# Altium PCB function_board.PcbDoc
Units mil, origin at the board's own origin, x right, y up, seen from the top; angles counter-clockwise.
Board outline 1380.09 x 1202 mil, 2 copper layers (Top Layer, Bottom Layer), stack 46.444 mil thick; 21 components, 25 nets, 102 pads, 51 vias.
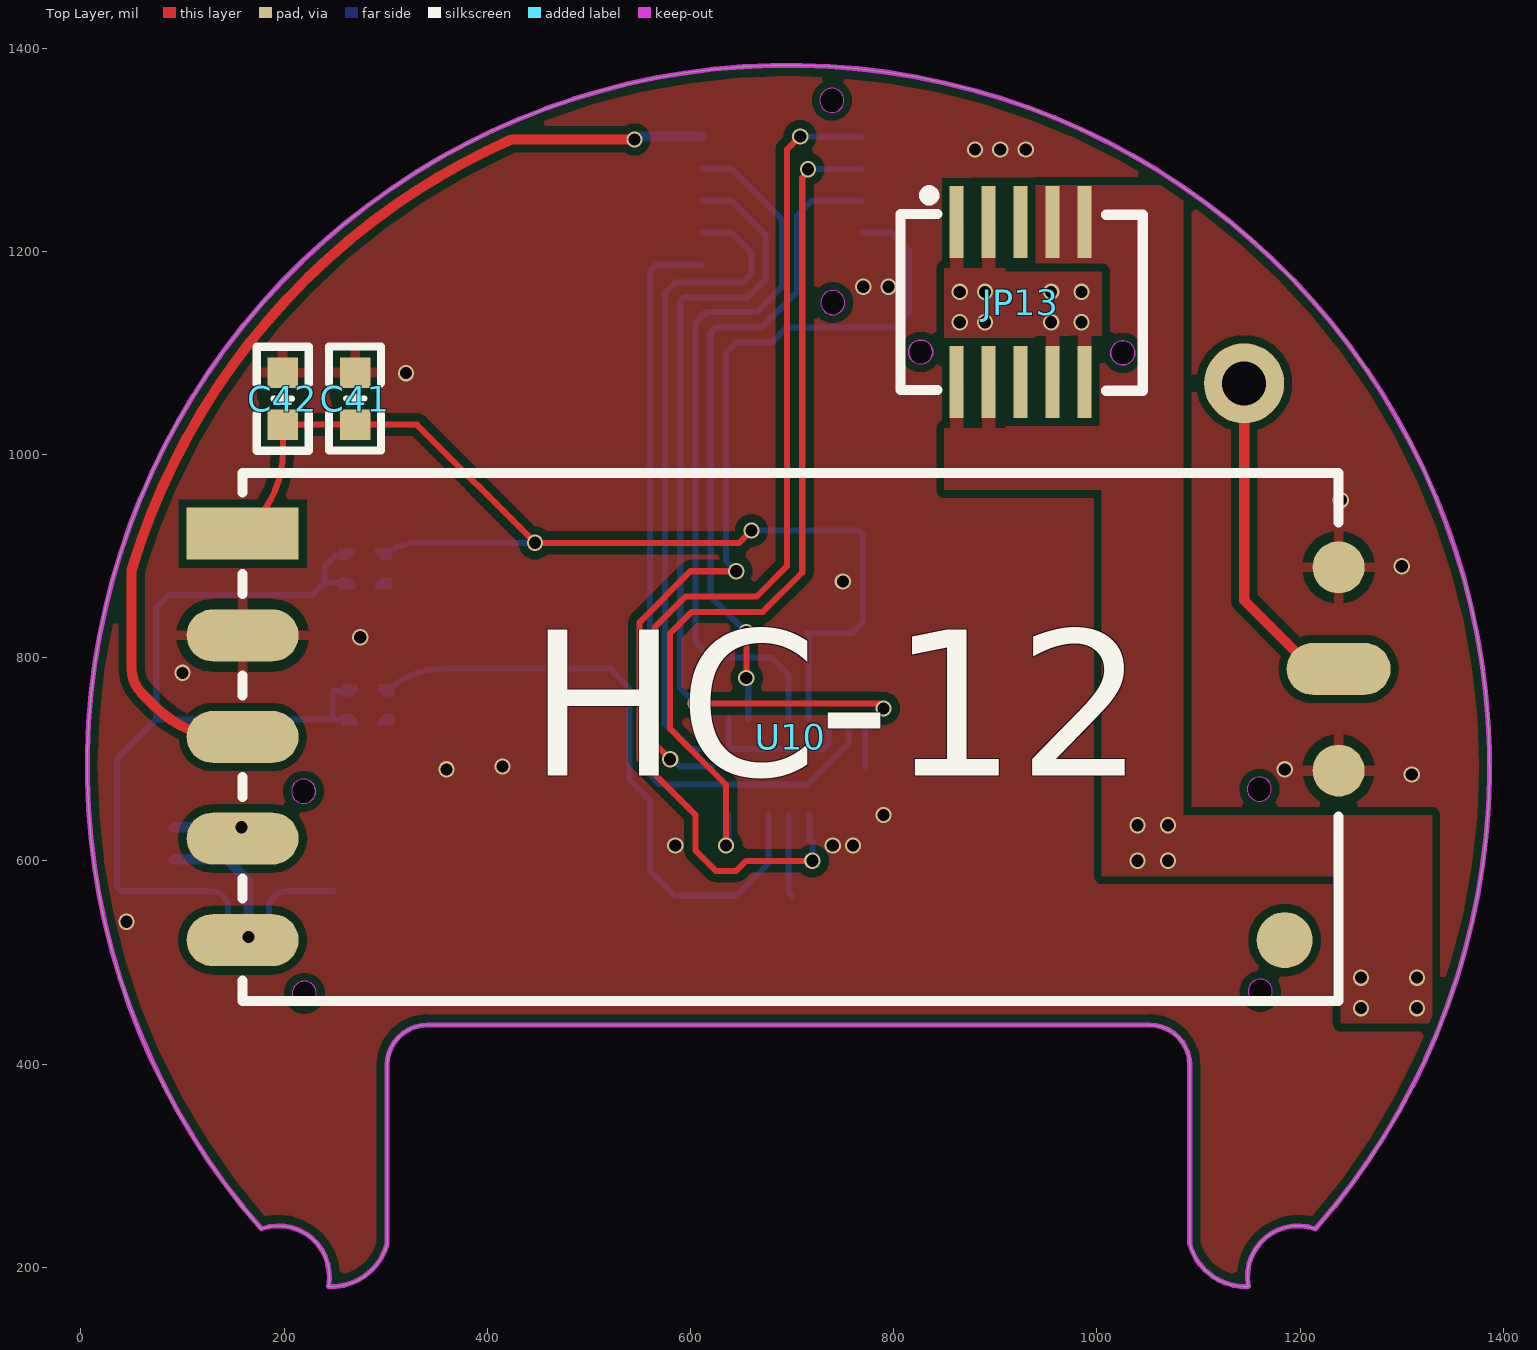
[diagram p0: Top Layer view]
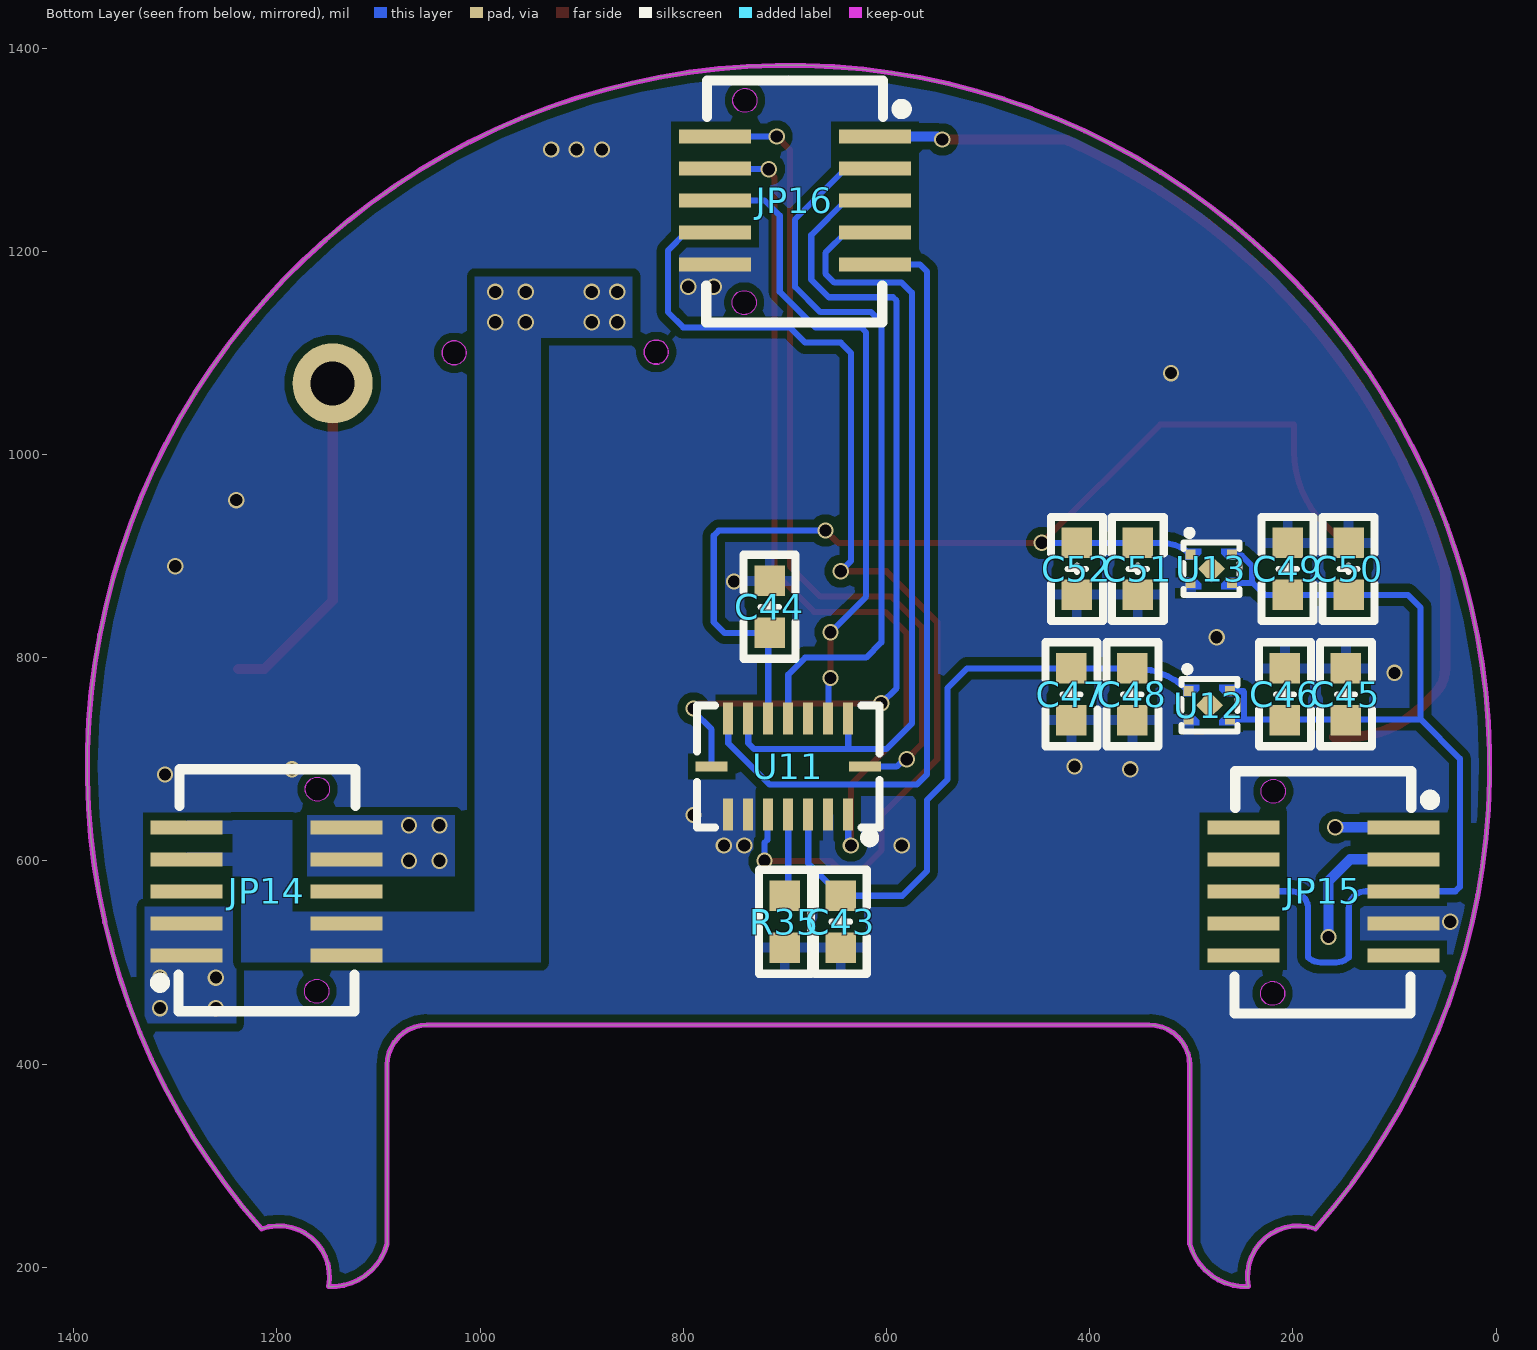
[diagram p1: Bottom Layer view, seen from below]
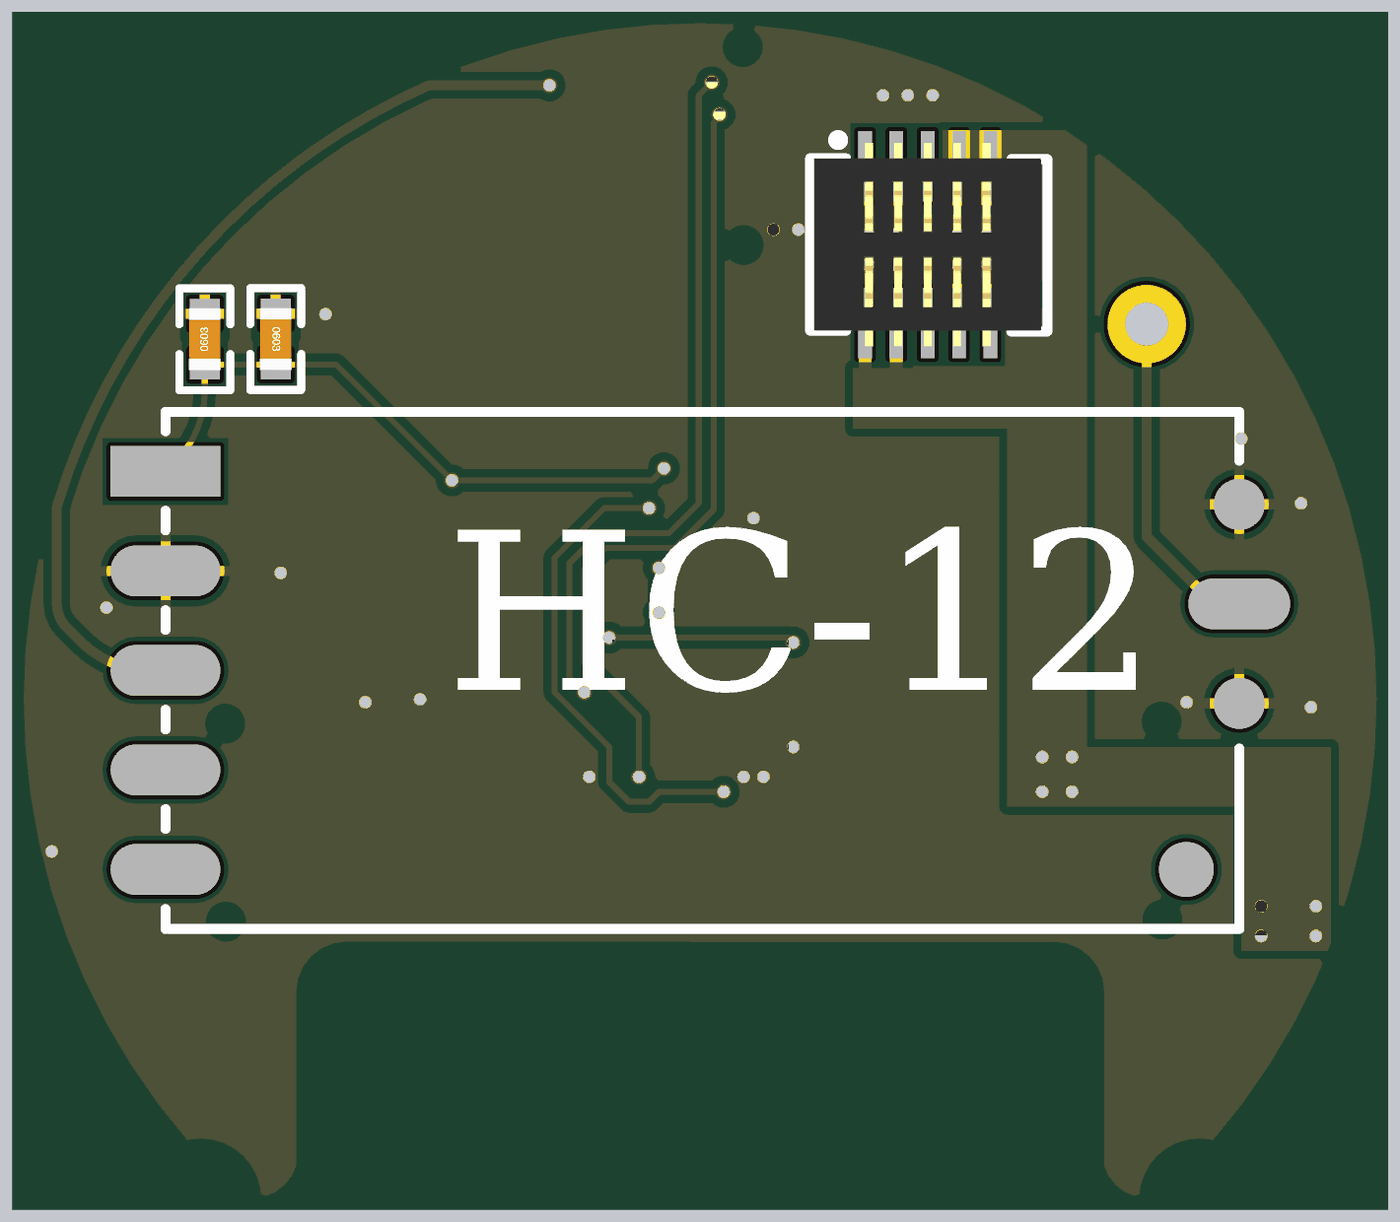
[diagram p2: 3D render of the assembled board from above, using the file's embedded part models]
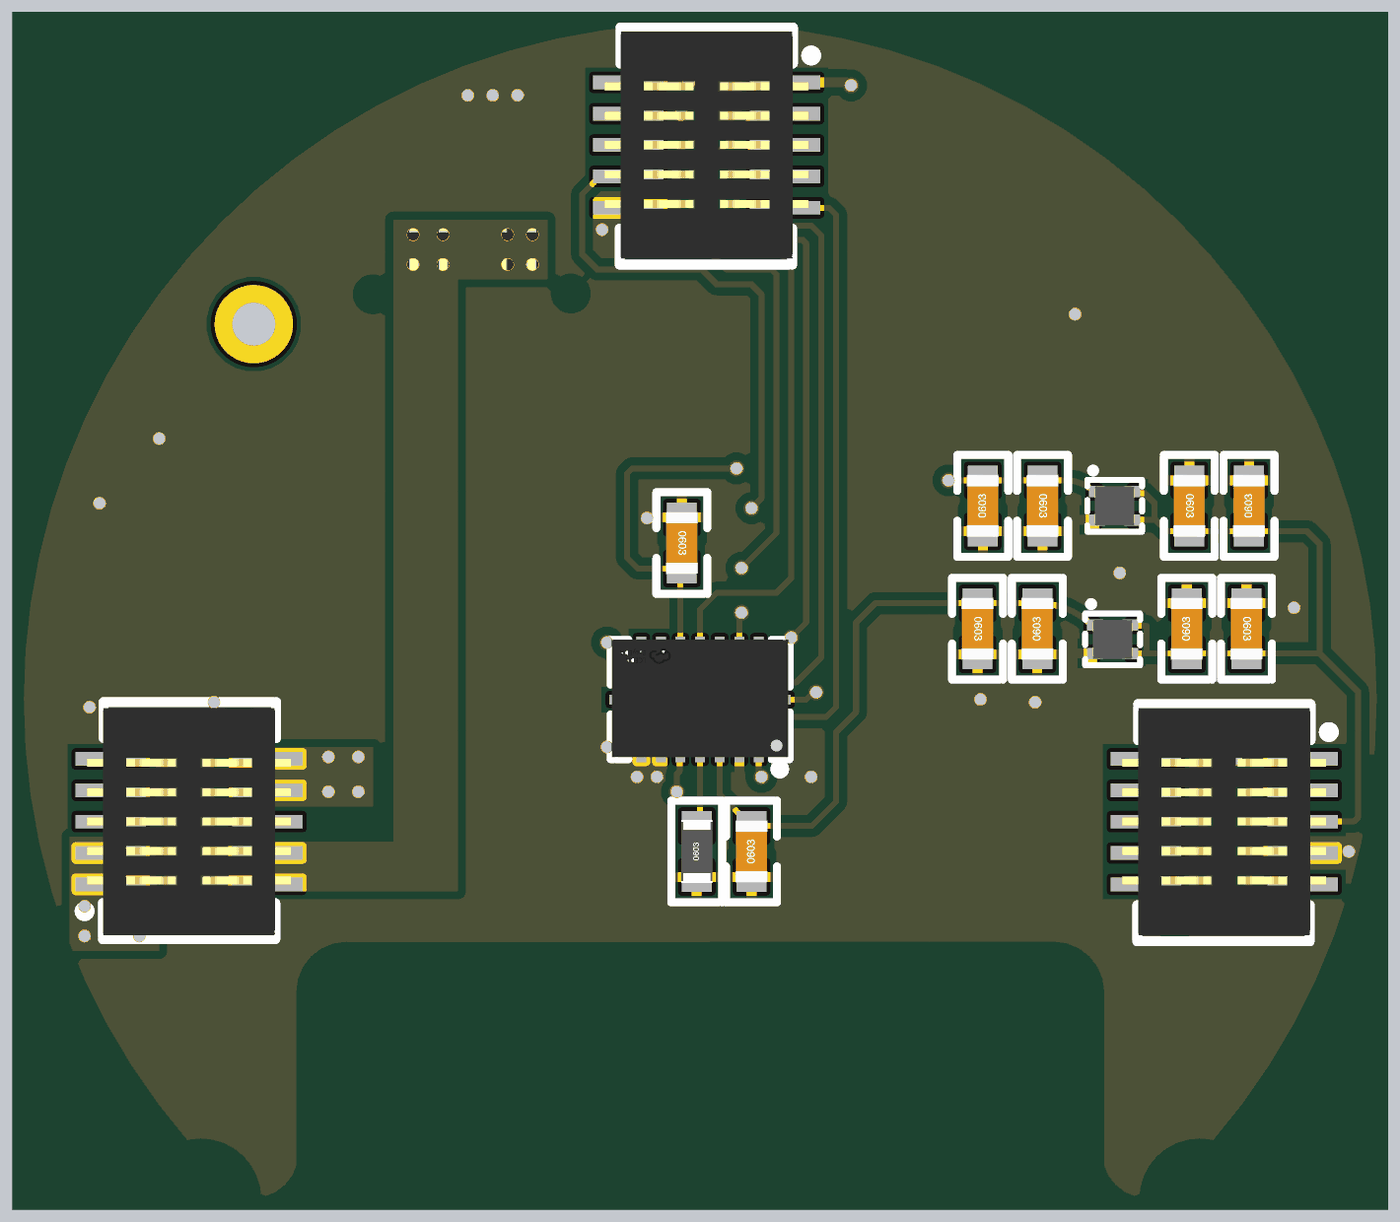
[diagram p3: 3D render of the assembled board from below, using the file's embedded part models]

## Layer stack, top to bottom
Top Solder: solder mask 0.4, Solder Resist, Dk 3.5
Top Layer: signal copper 1.4
Dielectric 1: dielectric 43.6441, FR-4, Dk 4.8
Bottom Layer: signal copper 1.4
Bottom Solder: solder mask 0.4, Solder Resist, Dk 3.5

## Board outline
177.62,237.72 cw(c194.6,190.71) 243.61,180.93 ccw(c246.43,237.87) 301.43,222.87 301.43,398.5 cw(c341.43,398.5) 341.43,438.5 1051.94,438.34 cw(c1051.94,398.85) 1091.43,398.85 1091.43,222.87 ccw(c1146.43,237.87) 1149.25,180.94 cw(c1198.22,190.83) 1215.29,237.78 ccw(c696.43,692.87) 651.51,1381.57 ccw(c696.43,692.87)

## Design rules (kind name [scope] priority, off if disabled: settings)
Clearance [All] p1: gap=8 ignorepadtopadclearanceinfootprint=TRUE except(0: Arc-Hole Track-Hole SMDPad-Hole THPad-Hole Via-Hole Fill-Hole Poly-Hole Region-Hole Text-Hole)
PolygonConnect [All] p1: connectstyle=Relief reliefconductorwidth=10 reliefentries=4 polygonreliefangle="90 Angle" airgapwidth=10
RoutingVias [All] p1: holewidth=28 width=50 viastyle="Through Hole" minholewidth=28 minwidth=50 maxholewidth=28 maxwidth=50
SolderMaskExpansion [All] p1: expansion=4 istentingtop=FALSE
Width [All] p1: maxlimit=20 minlimit=6 preferedwidth=8 minimp=50.000000 maximp=50.000000 favimp=50.000000
30 further rules are at their usual default settings.

## Components (designator, comment, footprint, x,y, rotation, side; value= is the part's Value field where it differs from the comment)
C41 "1uF" "C 0603_L" 270,1055 r270 top
C42 "0.1uF" "C 0603_L" 198.77,1054.82 r90 top
C43 "100nF" "C 0603_L" 645,540 r90 bottom
C44 "100nF" "C 0603_L" 715,850 r270 bottom
C45 "1uF" "C 0603_L" 147.71,763.88 r270 bottom
C46 "0.1uF" "C 0603_L" 207.71,763.88 r90 bottom
C47 "0.1uF" "C 0603_L" 417.86,763.87 r270 bottom
C48 "1uF" "C 0603_L" 357.86,763.88 r90 bottom
C49 "1uF" "C 0603_L" 205.14,887.38 r270 bottom
C50 "0.1uF" "C 0603_L" 145.16,887.38 r90 bottom
C51 "0.1uF" "C 0603_L" 352.59,887.38 r270 bottom
C52 "1uF" "C 0603_L" 412.59,887.38 r90 bottom
JP13 "Header 5*2" BTB-0.8mm-SMD-F-2*5PIN 925,1150 r0 top locked
JP14 "Header 5*2" BTB-0.8mm-SMD-F-2*5PIN 1210,570 r90 bottom locked
JP15 "Header 5*2" BTB-0.8mm-SMD-F-2*5PIN 170,570 r270 bottom locked
JP16 "Header 5*2" BTB-0.8mm-SMD-F-2*5PIN 690,1250 r270 bottom locked
R35 "0R" "R 0603_L" 700,540 r90 bottom
U10 "HC-12" HC-12 425,610 r0 top
U11 "BMI088" LGA-16_L4.5-W3.0-P0.50-BL 696.58,692.73 r90 bottom locked
U12 "RS3236" UTDFN1x1-4 282.2,753.18 r270 bottom
U13 "RS3236" UTDFN1x1-4 280.15,887.38 r270 bottom

## Footprints (in the part's own frame and the unit in brackets; to place one, negate y for a bottom-side part, rotate by r counter-clockwise, add the part's x,y. Pads: shape width x height; smd on the part's side, far side on the other; paste and mask are expansions set on the pad)
BTB-0.8mm-SMD-F-2*5PIN [mm] "0.8双槽插板对板母座，10PIN"
  rect 0.35x1.8 smd: 1(-1.6,2) 2(-1.6,-2) 3(-0.8,2) 4(-0.8,-2) 5(0,2) 6(0,-2) 7(0.8,2) 8(0.8,-2) 9(1.6,2) 10(1.6,-2)
  Keep-Out Layer board cut-out: -2.2,-1.25 -2.2,-1.31 -2.246,-1.42 -2.33,-1.504 -2.44,-1.55 -2.56,-1.55 -2.67,-1.504 -2.754,-1.42 -2.8,-1.31 -2.8,-1.25 -2.8,-1.19 -2.754,-1.08 -2.67,-0.996 -2.56,-0.95 -2.44,-0.95 -2.33,-0.996 -2.246,-1.08 -2.2,-1.19 -2.2,-1.25 -2.2,-1.25
  Keep-Out Layer board cut-out: 2.853,-1.27 2.853,-1.33 2.807,-1.44 2.723,-1.524 2.613,-1.57 2.493,-1.57 2.383,-1.524 2.299,-1.44 2.253,-1.33 2.253,-1.27 2.253,-1.21 2.299,-1.1 2.383,-1.016 2.493,-0.97 2.613,-0.97 2.723,-1.016 2.807,-1.1 2.853,-1.21 2.853,-1.27 2.853,-1.27
  Keep-Out Layer circle w0.025: c-2.5,-1.25 r0.3
  Keep-Out Layer circle w0.025: c2.553,-1.27 r0.3
  Keep-Out Layer region: -2.2,-1.25 -2.2,-1.31 -2.246,-1.42 -2.33,-1.504 -2.44,-1.55 -2.56,-1.55 -2.67,-1.504 -2.754,-1.42 -2.8,-1.31 -2.8,-1.25 -2.8,-1.19 -2.754,-1.08 -2.67,-0.996 -2.56,-0.95 -2.44,-0.95 -2.33,-0.996 -2.246,-1.08 -2.2,-1.19 -2.2,-1.25 -2.2,-1.25
  Keep-Out Layer region: 2.853,-1.27 2.853,-1.33 2.807,-1.44 2.723,-1.524 2.613,-1.57 2.493,-1.57 2.383,-1.524 2.299,-1.44 2.253,-1.33 2.253,-1.27 2.253,-1.21 2.299,-1.1 2.383,-1.016 2.493,-0.97 2.613,-0.97 2.723,-1.016 2.807,-1.1 2.853,-1.21 2.853,-1.27 2.853,-1.27
  silkscreen extent -3,-2.22 3.05,2.79, body extent -2.9,-2.6 2.9,2.6, height 3.9
"C 0603_L" [mil] "无极性贴片电容                                       淘宝ID:黄晶宝石"
  rect 30x30 smd: 1(-25.59,0) 2(25.59,0)
  silkscreen extent -51,-26 51,26, body extent -31,-16 31,16, height 32
HC-12 [mm] "433MHz无线串口模块"
  rect 2.8x1.3 smd: 1(-6.75,7.923)
  oval 2.8x1.3 smd: 2(-6.75,5.383) 3(-6.75,2.843) 4(-6.75,0.303) 5(-6.75,-2.237)
  oval 2.6x1.3 smd: 6(20.65,4.543)
  round 1.3 smd: 7(20.65,7.083) 8(20.65,2.003)
  round 1.4 smd: 9(19.3,-2.237)
  silkscreen extent -6.75,-3.76 20.65,9.44
LGA-16_L4.5-W3.0-P0.50-BL [mm]
  rect 0.8x0.25 smd: 1(-1.2,-1.498) 2(-1.2,-0.998) 3(-1.2,-0.498) 4(-1.2,0.002) 5(-1.2,0.502) 6(-1.2,1.002) 7(-1.2,1.502) 9(1.2,1.502) 10(1.2,1.002) 11(1.2,0.502) 12(1.2,0.002) 13(1.2,-0.498) 14(1.2,-0.998) 15(1.2,-1.498)
  rect 0.25x0.8 smd: 8(0,1.915) 16(0,-1.915)
  silkscreen extent -1.89,-2.29 1.52,2.29, body extent -1.48,-2.25 1.52,2.25, height 1.08
"R 0603_L" [mil] "1/10W贴片电阻                 淘宝ID:黄晶宝石"
  rect 30x30 smd: 1(-25.59,0) 2(25.59,0)
  silkscreen extent -51,-26 51,26, body extent -31,-16 31,16, height 16
UTDFN1x1-4 [mm]
  rect 0.25x0.25 smd: 1(-0.354,-0.52) 2(0.354,-0.52) 3(0.354,0.52) 4(-0.354,0.52)
  rect 0.48x0.48 smd rot 45: ""(0,0)
  Top Layer region: -0.508,-0.65 -0.225,-0.65 -0.225,-0.4 -0.375,-0.25 -0.508,-0.25
  Top Layer region: 0.508,-0.65 0.225,-0.65 0.225,-0.4 0.375,-0.25 0.508,-0.25
  Top Layer region: 0.508,0.65 0.225,0.65 0.225,0.4 0.375,0.25 0.508,0.25
  Top Layer region: -0.508,0.65 -0.225,0.65 -0.225,0.4 -0.375,0.25 -0.508,0.25
  silkscreen extent -0.98,-0.7 0.66,0.7, body extent -0.5,-0.52 0.5,0.52, height 0.6

## Part data
C41 C42 C43 C44 C45 C46 C47 C48 C49 C50 C51 C52: library part C, "贴片电容", BOM名称=无极性贴片电容, 淘宝ID="封装库来自淘宝 ID：黄晶宝石", 联系售后=https://shop463601444.taobao.com
JP13 JP14 JP15 JP16: "BTB Connector"
R35: library part R, "贴片电阻", BOM名称=贴片电阻, 版权归属="来自淘宝 ID：黄晶宝石", 联系售后=https://shop463601444.taobao.com
U10: "433MHz无线串口模块"
U11: "6-axis Motion Tracking for High-performance Applications"
U12 U13: "500mA LDO"

## Free pads (board coordinates)
  round 78.74 hole 43.31: 1(1145,1070)

## Via types
v1: diameter 16, hole 12, Top Layer to Bottom Layer, tented both sides, 51 vias

## Nets (pads, with @x,y where several pads share a name; then routed paths per layer and width w, separated by ;. In a path a pad name is that pad's centre, name@x,y a point inside that pad or via, vN(x,y) a via of type N, cw(c..) or ccw(c..) an arc to the next point about the centre after c; other vN are vias at no path point)
AGND: JP13.2 JP13.4 JP13.7 JP13.9 JP14.1 JP14.3 JP14.8 JP14.10
  other v1: 1260,455 1315,455 1260,485 1315,485 1040,600 1070,600 1040,635 1070,635
DGND: C41.1 C42.2 C43.1 C44.1 C45.1 C46.2 C47.2 C48.1 C49.1 C50.2 C51.2 C52.1 JP15.7 JP16.10 R35.1 U10.2 U10.7 U10.8 U11.2 U11.6 U11.7 U12.2 U13.2
  other v1: 45,540 585,615 740,615 760,615 790,645 1310,685 360,690 1185,690 415,692.87 100,785 275,820 750,875 1300,890 1240,955 320,1080 770,1165 795,1165 880,1300 905,1300 930,1300
IMU_INT1_ACCEL: JP16.2 U11.16 | length 824.4
  Top Layer w6: v1(580,700) 565,715 565,830 595,860 665,860 695,890 695,1300 v1(707.99,1312.99)
  Bottom Layer w6: v1(580,700) 582.71,700 589.98,692.73 U11.16 ; v1(707.99,1312.99) JP16.2
IMU_INT2_ACCEL: JP16.4 U11.1 | length 870.6
  Top Layer w6: v1(635,615) 635,675 580,730 580,823.79 601.21,845 671.21,845 710,883.79 710,1272.29 715.75,1278.04 v1(715.75,1280.75)
  Bottom Layer w6: v1(635,615) 635,617.71 637.61,620.32 U11.1 ; v1(715.75,1280.75) 767.99,1280.75 JP16.4
IMU_INT3_GYRO: JP16.3 U11.12 | length 728.5
  Bottom Layer w6: JP16.3 639.8,1281.49 690,1231.3 690,1165 665,1140 615,1140 605,1130 605,815 620,800 680,800 696.66,783.34 U11.12
IMU_INT4_GYRO: JP16.1 U10.3 | length 1008.3
  Top Layer w10: U10.3 144.49,721.93 cw(c144.49,821.93) 73.78,751.22 60,765 cw(c84.14,789.14) 50,789.14 50,885 cw(c59.99,884.5) 50.4,887.33 cw(c696.43,692.87) 309.57,1245.61 cw(c696.43,692.87) 421.91,1309.16 cw(c425.92,1300) 425.88,1310 v1(545,1310)
  Bottom Layer w10: v1(545,1310) 546.62,1310 549.62,1312.99 JP16.1
IMU_SPI2_CSB1_ACCEL: JP16.6 U11.14 | length 642
  Top Layer w6: v1(655,780) v1(655,825)
  Bottom Layer w6: v1(655,780) 655,777.29 656.92,775.37 656.92,740.34 U11.14 ; v1(655,825) 620,860 620,1120 625,1125 670,1125 705,1160 705,1235 720,1250 JP16.6
IMU_SPI2_CSB2_GYRO: JP16.8 U11.5 | length 1068.2
  Top Layer w6: v1(645,885) 600,885 550,835 550,700 605,645 605,610 625,590 645,590 655,600 v1(720,600)
  Bottom Layer w6: v1(645,885) 635,895 635,1100 645,1110 680,1110 695,1125 800,1125 815.17,1140.17 815.17,1200.62 797.28,1218.51 JP16.8 ; U11.5 717.08,644.77 717.08,620.74 720,617.82 v1(720,600)
IMU_SPI2_MISO: JP16.7 U11.10 U11.15 | length 823.3
  Bottom Layer w6: JP16.7 639.8,1218.51 660,1198.32 660,1177.87 651.25,1169.11 585,1169.11 575,1159.11 575,735 600,710 637.61,710 640,710 ; U11.15 637.61,712.39 640,710 ; U11.10 736.03,715.83 730.2,710 640,710
IMU_SPI2_MOSI: JP16.9 U11.9 | length 790.1
  Bottom Layer w6: JP16.9 611.08,1186.83 566.83,1186.83 560,1180 560,685 570,675 715,675 755.72,715.72 U11.9
IMU_SPI2_SCK: JP16.5 U11.8 | length 867.5
  Top Layer w6: v1(605,755) 785,755 v1(790,750)
  Bottom Layer w6: v1(605,755) 590,770 590,1151.14 593.51,1154.66 656.59,1154.66 674,1172.07 674,1215.81 639.8,1250 JP16.5 ; U11.8 771.97,729.27 790,747.29 v1(790,750)
LoRa_ANT: pad.1 U10.6 | length 334.7
  Top Layer w10: pad.1 1145,856.26 1212.4,788.86 U10.6
LoRa_GPIO_BUSY: JP15.9
LoRa_GPIO_DI01: JP15.3 U10.5 | length 137.6
  Bottom Layer w10: JP15.3 143.51,601.49 165,580 v1(165,525)
LoRa_GPIO_RESET: JP15.1 U10.4 | length 67
  Bottom Layer w10: JP15.1 v1(158.24,632.99)
LoRa_SPI1_CS: JP15.2
LoRa_SPI1_MISO: JP15.8
LoRa_SPI1_MOSI: JP15.4
LoRa_SPI1_SCK: JP15.10
NetANT1_2: 
NetR35_2: R35.2 U11.4 | length 81.3
  Bottom Layer w6: U11.4 696.66,568.92 R35.2
VBAT: JP13.1 JP13.3 JP13.8 JP13.10 JP14.2 JP14.4 JP14.7 JP14.9
  other v1: 865,1130 890,1130 955,1130 985,1130 865,1160 890,1160 955,1160 985,1160
VBAT_CTL: C45.2 C46.1 C49.2 C50.1 JP15.5 JP15.6 U12.3 U12.4 U13.3 U13.4 | length 1088.2
  Bottom Layer w6: 239.41,873.44 227.76,861.79 C49.2 C50.1 86.79,861.79 74.24,849.24 74.24,739.24 ; JP15.6 202.08,570 ccw(c202.08,552.92) 190,565 ccw(c202.07,552.93) 185,552.93 185,505 cw(c172.93,517.07) 172.93,500 157.07,500 cw(c157.07,517.07) 145,505 145,552.93 ccw(c127.93,552.93) 140,565 ccw(c127.92,552.92) 127.92,570 40,570 35.54,574.47 35.54,700.54 74.24,739.24 ; U13.3 250.3,873.44 240,873.44 240,890 250.21,900.21 258.56,900.21 U13.4 ; U12.3 247.86,739.24 ; U12.4 261.49,766.9 248.72,766.9 247.86,766.04 247.86,739.24 ; 74.24,739.24 247.86,739.24
VDD: C41.2 C42.1 C44.2 C51.1 C52.2 U10.1 U11.11 U13.1 | length 1124.9
  Top Layer w6: U10.1 169.48,932.16 ccw(c98.77,1002.87) 198.77,1002.87 C42.1 198.96,1029.41 C41.2 330.59,1029.41 v1(447.03,912.97) 647.97,912.97 v1(660,925)
  Bottom Layer w6: U13.1 cw(c328.74,873.21) 328.74,912.97 C52.2 v1(447.03,912.97) ; v1(660,925) 765,925 770,920 770,835 759.41,824.41 C44.2 716.35,823.06 U11.11
VDD_IMU: C43.2 C47.1 C48.2 U11.3 U12.1 | length 627.9
  Bottom Layer w6: U12.1 cw(c356.61,713.19) 356.61,789.47 C47.1 520.53,789.47 540,770 540,680 560,660 560,590 584.41,565.59 C43.2 676.98,597.57 U11.3
pads on no net: JP13.5 JP13.6 JP14.5 JP14.6 U10.9 U11.13 U12. U13.

## Polygon pours and split planes (outlines as drawn)
DGND on Bottom Layer "DGND_L02_P009" (solid, pour order 9): 177.62,237.72 cw(c194.6,190.71) 243.61,180.93 ccw(c246.43,237.87) 301.43,222.87 301.43,398.5 cw(c341.43,398.5) 341.43,438.5 1051.94,438.34 cw(c1051.94,398.85) 1091.43,398.85 1091.43,222.87 ccw(c1146.43,237.87) 1149.25,180.94 cw(c1198.22,190.83) 1215.29,237.78 ccw(c696.43,692.87) 651.51,1381.57 ccw(c696.43,692.87)
AGND on Bottom Layer "AGND_L02_P007" (solid, pour order 7): 1240,440 1330,440 1330,555 1240,555
AGND on Bottom Layer "AGND_L02_P006" (solid, pour order 6): 1025,585 1025,645 1170,645 1170,585
VBAT on Bottom Layer "VBAT_L02_P000" (solid, pour order 0): 850,1175 910,1175 1005,1175 1005,550 1185,550 1185,640 1330,640 1330,585 1235,585 1235,500 940,500 940,1115 850,1115
DGND on Top Layer "DGND_L01_P008" (solid, pour order 8): 177.62,237.72 cw(c194.6,190.71) 243.61,180.93 ccw(c246.43,237.87) 301.43,222.87 301.43,398.5 cw(c341.43,398.5) 341.43,438.5 1051.94,438.34 cw(c1051.94,398.85) 1091.43,398.85 1091.43,222.87 ccw(c1146.43,237.87) 1149.25,180.94 cw(c1198.22,190.83) 1215.29,237.78 ccw(c696.43,692.87) 651.51,1381.57 ccw(c696.43,692.87)
AGND on Top Layer "AGND_L01_P005" (solid, pour order 5): 940,1265 1080,1265 1085,1260 1085,645 1330,645 1330,440 1240,440 1240,585 1005,585 1005,965 850,965 850,1105
VBAT on Top Layer "VBAT_L01_P003" (solid, pour order 3): 940,1030 1005,1030 1005,1180 910,1180 910,1270 850,1270 850,1115 940,1115

## Keep-outs
Keep-Out Layer:
  the board outline again, w5

## Silkscreen, mask and mechanical layers (free items; w line width, h text height)
Mechanical 1:
  the board outline again, w5